# EAGLE board Keg Cop - Main (EAGLE 9.6.2)
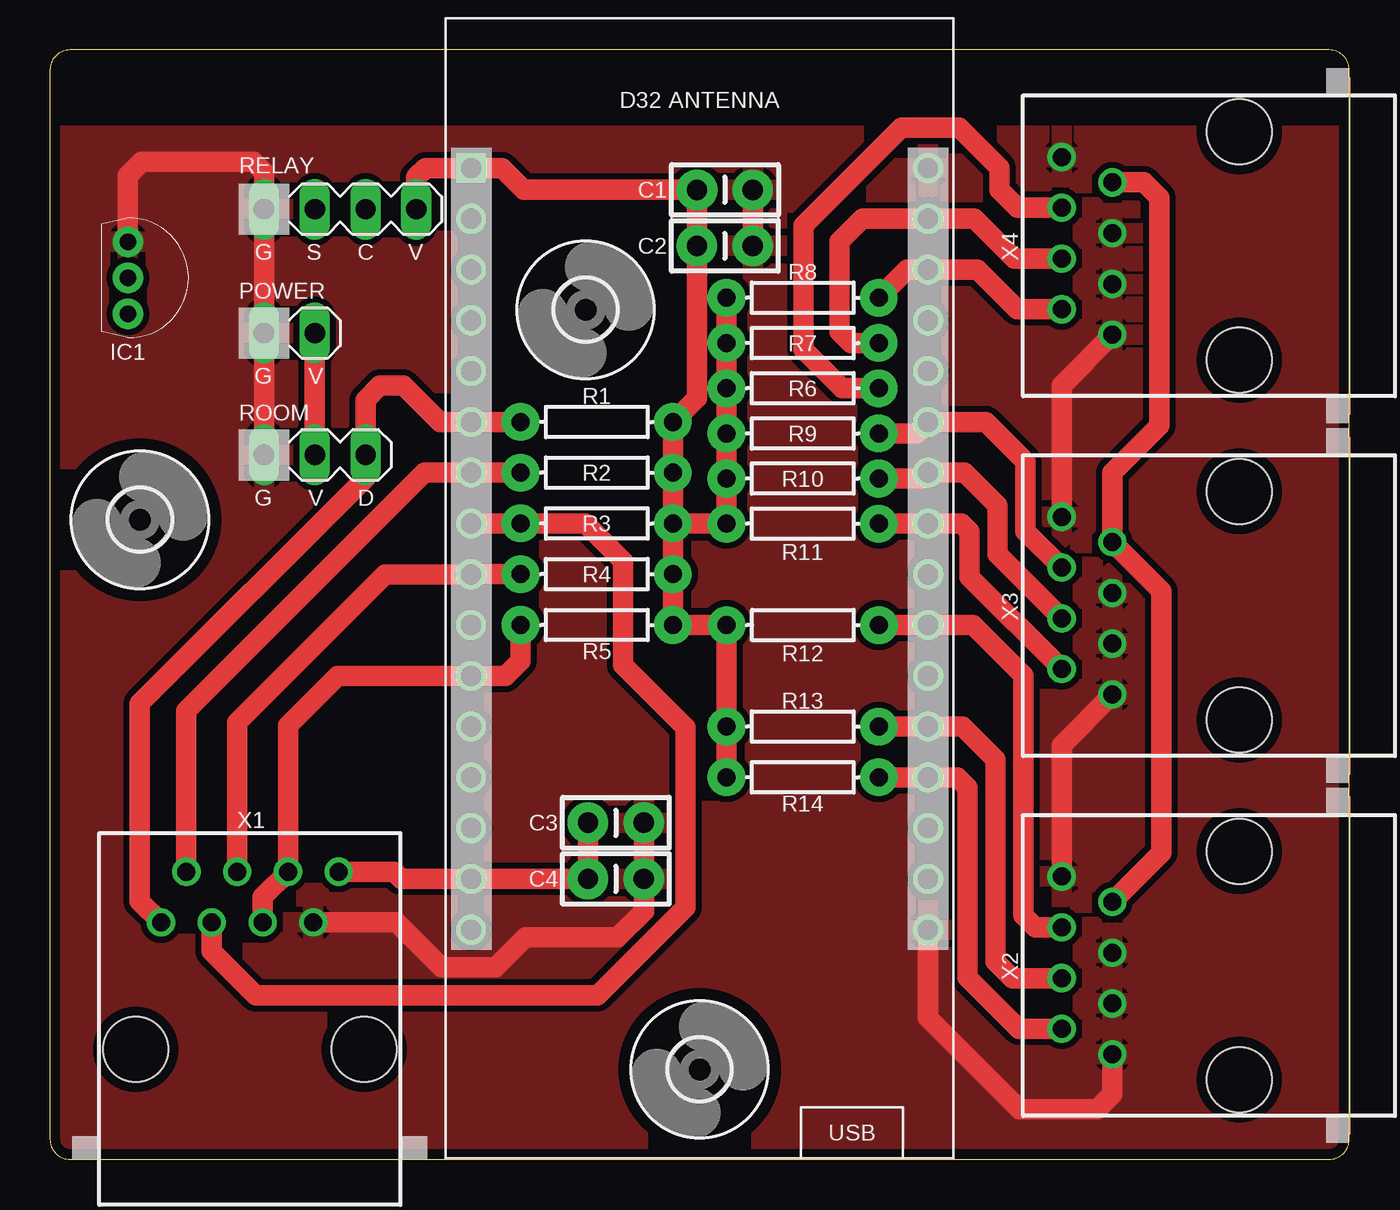
[diagram p0: board, top side]
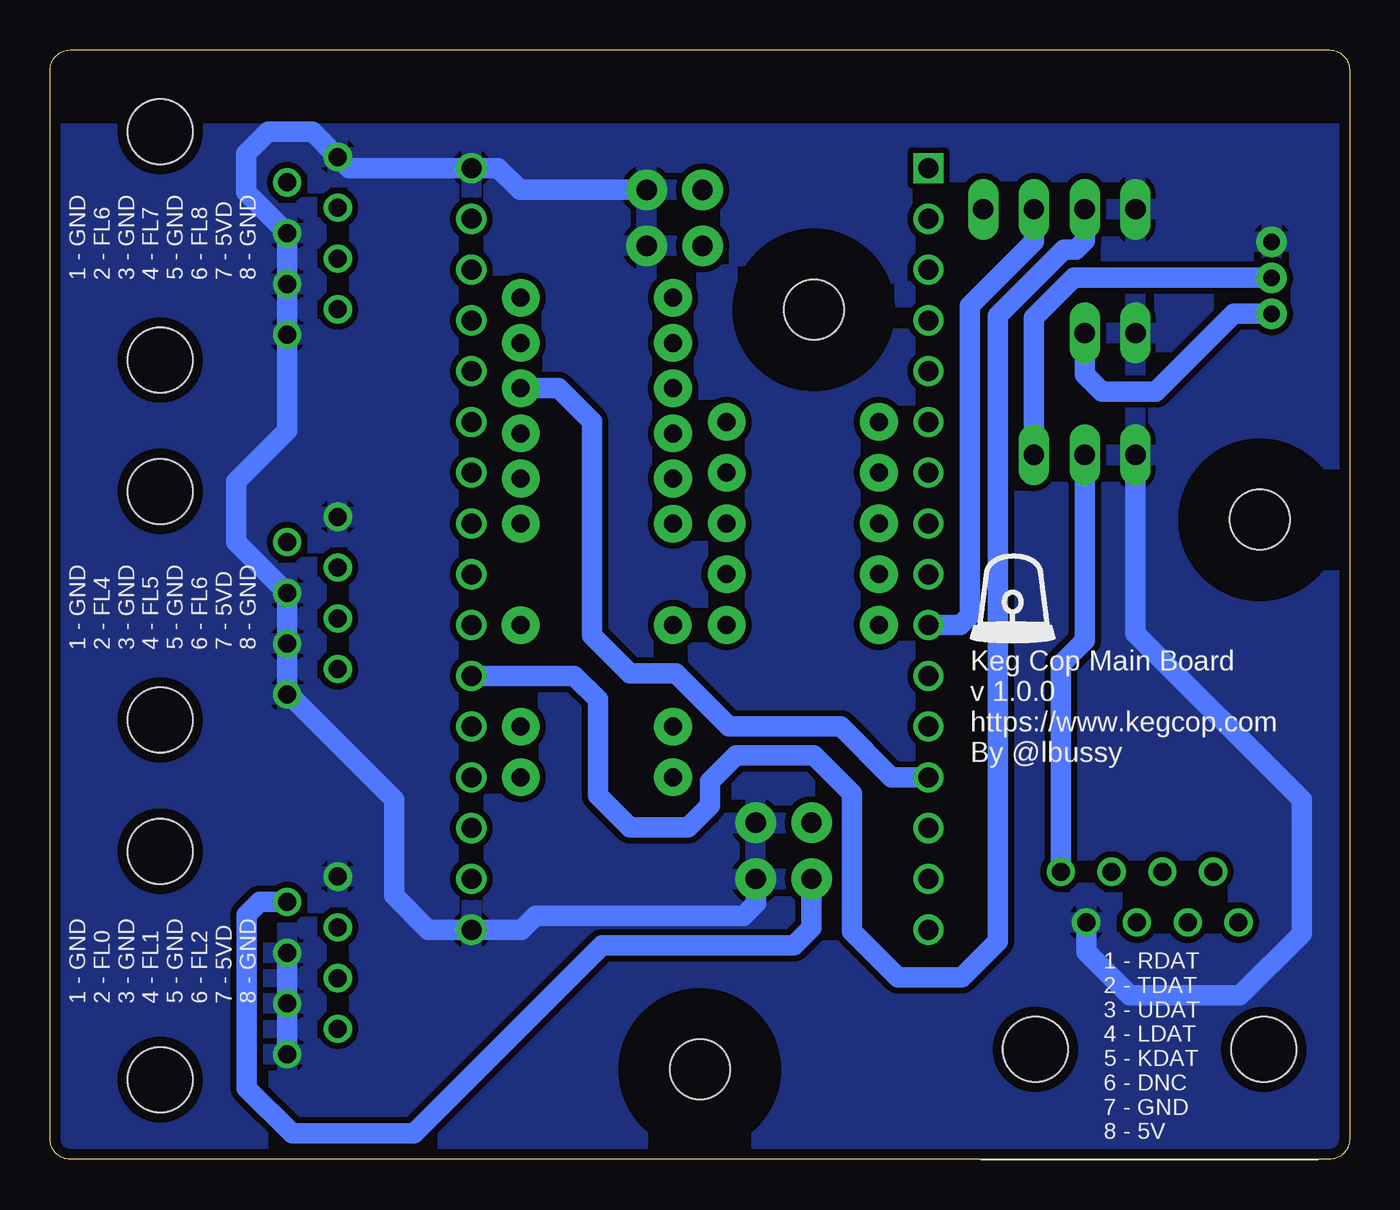
[diagram p1: board, bottom side, seen from below]

Size 65.01 x 55.51 mm. Coordinates in mm from the lower left corner, seen from the top.
Outline: 1,0.01 64,0.01 arc90 65,1.01 65,54.51 arc90 64,55.51 1,55.51 arc90 0,54.51 0,1.01 arc90 1,0.01
Copper layers (1*16): Top 0.035mm / dielectric 1.5mm / Bottom 0.035mm
Design rules "default *": minimum track width 6mil, minimum drill 0.35mm, track to track 6mil, track to pad 6mil, pad to pad 6mil, via to via 6mil, smd to smd 6mil, copper to edge 20mil, drill to drill 6mil, minimum pad ring 10mil, minimum via ring 8mil, stop-mask expansion 4mil, vias tented up to drill 20mil, thermal gap 10mil
Net classes: 0 default: width 0.305 mm, clearance 0.305 mm; 1 5v: width 0.406 mm, clearance 0.406 mm; 2 3v: width 0.406 mm, clearance 0.406 mm

## Footprints (pad centres in the part's own frame; a part is rotated, then mirrored left to right if it is on the bottom)
CAP_PTH-2.54 = drill 1.016 pad 2.032: 1 -1.397,0; 2 1.397,0
D32_NO_BATT = drill 1: EN -11.43,-12.7; GND 11.43,20.32; GND2 11.43,-17.78; IO0 11.43,-10.16; IO2 11.43,-12.7; IO4 11.43,-7.62; IO5 11.43,0; IO12 -11.43,-7.62; IO13 -11.43,-10.16; IO14 -11.43,-5.08; IO15 11.43,-15.24; IO16 11.43,-5.08; IO17 11.43,-2.54; IO18 11.43,2.54; IO19 11.43,5.08; IO21 11.43,7.62; IO22 11.43,15.24; IO23 11.43,17.78; IO25 -11.43,2.54; IO26 -11.43,0; IO27 -11.43,-2.54; IO32 -11.43,7.62; IO33 -11.43,5.08; IO34 -11.43,10.16; RST -11.43,17.78; RXD0 11.43,10.16; TXD0 11.43,12.7; VBAT -11.43,-17.78; VBUS -11.43,-15.24; VN -11.43,12.7; VP -11.43,15.24 | drill 1 square: VCC -11.43,20.32
TO-92 = drill 0.81 pad 1.51: 1 0,-1.8; 2 0,0; 3 0,1.8
HDR-2_VERT = drill 1.016 long: 1 0,0; 2 2.54,0
AXIAL-0.3 = drill 0.9 pad 1.88: P$1 -3.81,0; P$2 3.81,0
MA04-1 = drill 1.016 long: 1 -3.81,0; 2 -1.27,0; 3 1.27,0; 4 3.81,0
HDR-3_VERT = drill 1.016 long: 1 0,0; 2 2.54,0; 3 5.08,0
3,0 = hole 3: 0,0
RJ45-NO-SHIELD = drill 0.9 pad 1.4: 1 -4.445,6.35; 2 -3.175,8.89; 3 -1.905,6.35; 4 -0.635,8.89; 5 0.635,6.35; 6 1.905,8.89; 7 3.175,6.35; 8 4.445,8.89 | hole 3.251: -5.715,0; 5.715,0

## Placement (x,y rotation side)
C1  0.1μF  [CAP_PTH-2.54]  33.77,48.51 0 top
C2  1.0μF  [CAP_PTH-2.54]  33.76,45.71 0 top
C3  0.1μF  [CAP_PTH-2.54]  28.31,16.85 0 top
C4  1.0μF  [CAP_PTH-2.54]  28.31,14.04 0 top
D32  Lolin D32  [D32_NO_BATT]  32.5,29.28 0 top
IC1  DS18B20+  [TO-92]  3.9,44.11 180 top
POWER  2-PIN  [HDR-2_VERT]  10.71,41.35 0 top
R1  2.2kΩ  [AXIAL-0.3]  27.35,36.9 180 top
R2  2.2kΩ  [AXIAL-0.3]  27.35,34.36 180 top
R3  2.2kΩ  [AXIAL-0.3]  27.35,31.82 180 top
R4  2.2kΩ  [AXIAL-0.3]  27.35,29.28 180 top
R5  2.2kΩ  [AXIAL-0.3]  27.35,26.74 180 top
R6  2.2kΩ  [AXIAL-0.3]  37.66,38.59 180 top
R7  2.2kΩ  [AXIAL-0.3]  37.66,40.85 180 top
R8  2.2kΩ  [AXIAL-0.3]  37.66,43.11 180 top
R9  2.2kΩ  [AXIAL-0.3]  37.66,36.33 180 top
R10  2.2kΩ  [AXIAL-0.3]  37.66,34.07 180 top
R11  2.2kΩ  [AXIAL-0.3]  37.66,31.81 180 top
R12  2.2kΩ  [AXIAL-0.3]  37.66,26.74 180 top
R13  2.2kΩ  [AXIAL-0.3]  37.66,21.66 180 top
R14  2.2kΩ  [AXIAL-0.3]  37.66,19.13 180 top
RELAY  4-PIN  [MA04-1]  14.52,47.55 0 top
ROOM  3-PIN  [HDR-3_VERT]  10.71,35.25 0 top
U$1  [3,0]  4.5,32.01 0 top
U$2  [3,0]  32.5,4.51 0 top
U$3  [3,0]  26.8,42.51 0 top
X1  RJ45-8X  [RJ45-NO-SHIELD]  10,5.51 0 top
X2  RJ45-8X  [RJ45-NO-SHIELD]  59.5,9.71 90 top
X3  RJ45-8X  [RJ45-NO-SHIELD]  59.5,27.71 90 top
X4  RJ45-8X  [RJ45-NO-SHIELD]  59.5,45.71 90 top

## Library data of the parts
C1-C4 D32 POWER ROOM = Donnie
IC1 = SamacSys_Parts; ARROW_PART_NUMBER: DS18B20+; DESCRIPTION: DS18B20 prog thermometer 1-Wire, TO92; HEIGHT: mm; MANUFACTURER_NAME: Maxim Integrated; MANUFACTURER_PART_NUMBER: DS18B20+; MOUSER_PART_NUMBER: 700-DS18B20+; MOUSER_PRICE-STOCK: https://www.mouser.co.uk/ProductDetail/Maxim-Integrated/DS18B20%2b?qs=7H2Jq%252ByxpJKegCKabDbglA%3D%3D
R1-R14 = SparkFun-Resistors
RELAY = Donnie; OC_FARNELL: unknown; OC_NEWARK: unknown
U$1-U$3 = holes
X1-X4 = con-tycoelectronics; MPN: RJ45-8X; OC_FARNELL: unknown; OC_NEWARK: 16R6101

## Nets
3V3 [3v]: C1.1 C2.1 D32.VCC R1.P$1 R2.P$1 R3.P$1 R4.P$1 R5.P$1 R6.P$2 R7.P$2 R8.P$2 R9.P$2 R10.P$2 R11.P$2 R12.P$2 R13.P$2 R14.P$2 RELAY.4
5V [5v]: C3.1 C4.1 D32.VBUS IC1.3 POWER.2 ROOM.2 X1.8 X2.7 X3.7 X4.7
COOL: D32.IO27 RELAY.3
GND: C1.2 C2.2 C3.2 C4.2 D32.GND D32.GND2 IC1.1 POWER.1 RELAY.1 ROOM.1 X1.7 X2.1 X2.3 X2.5 X2.8 X3.1 X3.3 X3.5 X3.8 X4.1 X4.3 X4.5 X4.8
KDAT: D32.IO14 R5.P$2 X1.5 X1.6
KEG0: D32.IO0 R14.P$1 X2.2
KEG1: D32.IO4 R13.P$1 X2.4
KEG2: D32.IO17 R12.P$1 X2.6
KEG3: D32.IO18 R11.P$1 X3.2
KEG4: D32.IO19 R10.P$1 X3.4
KEG5: D32.IO21 R9.P$1 X3.6
KEG6: D32.IO22 R8.P$1 X4.2
KEG7: D32.IO23 R7.P$1 X4.4
KEG8: D32.IO13 R6.P$1 X4.6
LDAT: D32.IO26 R4.P$2 X1.4
RDAT: D32.IO32 IC1.2 R1.P$2 ROOM.3 X1.1
SOL: D32.IO16 RELAY.2
TDAT: D32.IO33 R2.P$2 X1.2
UDAT: D32.IO25 R3.P$2 X1.3

## Tracks (layer width: path | path; a pad name or v marks a point on that pad's centre or on a via)
3V3
  Top 1.016: R3.P$1 R4.P$1 R5.P$1 R12.P$2 | R3.P$1 R2.P$1 R1.P$1 32.36,38.1 C2.1 C1.1 23.7,48.51 22.61,49.6 D32.VCC 18.79,49.6 18.33,49.14 RELAY.4 | R8.P$2 R7.P$2 R6.P$2 R9.P$2 R10.P$2 R11.P$2 31.17,31.81 R3.P$1 | R12.P$2 | R14.P$2 R13.P$2 R12.P$2 | R12.P$2
5V
  Top 1.016: X1.8 17.21,14.4 17.57,14.04 D32.VBUS C4.1 C3.1 | ROOM.2 POWER.2 | X2.7 55.6,15.34 55.6,28.44 X3.7 53.15,34.36 55.5,36.71 55.5,48.11 54.73,48.89 X4.7
  Bottom 1.016: X1.8 14.45,24.77 13.25,25.96 ROOM.2 | POWER.2 13.25,39.26 12.4,38.41 9.7,38.41 5.8,42.31 IC1.3 | C4.1 26.91,11.6 27.8,10.71 37.4,10.71 46.8,1.31 52.9,1.31 55.16,3.57 55.16,12.25 54.52,12.89 X2.7
COOL
  Bottom 1.016: D32.IO27 19.47,26.74 19,27.21 19,42.61 19,42.71 15.79,45.92 RELAY.3
GND
  Top 1.016: C2.2 C1.2 | X1.7 17.35,11.86 19.6,9.61 22.3,9.61 23.8,11.11 28.4,11.11 29.71,12.42 C4.2 C3.2 | ROOM.1 POWER.1 RELAY.1 10.71,49.4 10.2,49.91 4.6,49.91 3.9,49.21 IC1.1 | X2.1 53.15,3.26 52.4,2.51 48.5,2.51 43.93,7.08 D32.GND2 | X3.8 50.61,38.73 X4.1 | X2.8 50.61,20.73 X3.1
  Bottom 1.016: C1.2 41.5,48.51 42.59,49.6 D32.GND 46.89,49.6 50.05,49.6 X4.8 51.87,51.41 54.1,51.41 55.2,50.31 55.2,48.4 X4.5 X4.3 X4.1 53.15,36.46 55.7,33.91 55.7,30.9 X3.5 X3.3 | X1.7 13.18,10.39 11,8.21 5.49,8.21 2.4,11.3 2.4,18.01 10.71,26.32 ROOM.1 | C4.2 29.7,12.81 30.31,12.2 40.71,12.2 41.41,11.5 D32.GND2 46.09,11.5 47.8,13.21 47.8,18.01 53.15,23.36 X3.3 | X2.1 X2.3 X2.5 | X3.1 X3.3
  pour Top: 65.4,51.21 65.4,-0.09 -0.2,-0.09 -0.2,51.21
  pour Bottom: -0.2,51.31 -0.2,-0.29 65.2,-0.29 65.2,51.31
KDAT
  Top 1.016: X1.5 10.63,13.13 X1.6 11.9,21.72 14.39,24.2 D32.IO14 22.79,24.2 23.54,24.95 R5.P$2
KEG0
  Top 1.016: X2.2 48.48,6.54 45.9,9.11 45.9,18.61 45.39,19.12 D32.IO0 R14.P$1
KEG1
  Top 1.016: X2.4 48.13,9.08 47.3,9.91 47.3,20.01 45.65,21.66 D32.IO4 R13.P$1
KEG2
  Top 1.016: X2.6 49.3,11.62 48.7,12.21 48.7,24.21 46.17,26.74 D32.IO17 R12.P$1
KEG3
  Top 1.016: X3.2 46,29.15 46,31.41 45.59,31.82 D32.IO18 R11.P$1
KEG4
  Top 1.016: X3.4 47.4,30.29 47.4,32.71 45.75,34.36 D32.IO19 43.64,34.07 R10.P$1
KEG5
  Top 1.016: X3.6 48.8,31.43 48.8,34.91 46.81,36.9 D32.IO21 43.36,36.33 R9.P$1
KEG6
  Top 1.016: X4.2 48.38,42.54 46.39,44.52 D32.IO22 42.88,44.52 R8.P$1
KEG7
  Top 1.016: X4.4 48.23,45.08 46.25,47.06 D32.IO23 40.65,47.06 39.5,45.91 39.5,41.41 40.06,40.85 R7.P$1
KEG8
  Top 1.016: R6.P$1 39.62,38.59 37.7,40.51 37.7,46.71 42.6,51.61 45.5,51.61 47.5,49.61 47.5,48.51 48.4,47.61 X4.6
  Bottom 1.016: R6.P$1 39.58,38.59 37.9,36.91 37.9,26.21 36,24.31 33.7,24.31 31.05,21.66 30.25,21.66 25.45,21.66 22.91,19.12 D32.IO13
LDAT
  Top 1.016: X1.4 9.37,21.88 16.77,29.28 20.9,29.28 | 20.9,29.28 D32.IO26 | R4.P$2 20.9,29.28
RDAT
  Top 1.016: X1.1 4.5,12.92 4.5,22.81 15.79,34.1 ROOM.3 15.79,38 16.5,38.71 17.7,38.71 19.51,36.9 D32.IO32 R1.P$2
  Bottom 1.016: ROOM.3 15.79,42.1 15.8,42.11 13.8,44.11 IC1.2
SOL
  Bottom 1.016: RELAY.2 13.25,45.96 13.7,45.51 14.3,45.51 17.6,42.21 17.6,10.91 19.4,9.11 22.6,9.11 24.9,11.41 24.9,18.31 26.8,20.21 30.7,20.21 32,18.91 32,17.71 33.1,16.61 36,16.61 37.6,18.21 37.6,23.01 38.79,24.2 D32.IO16
TDAT
  Top 1.016: X1.2 6.83,22.44 18.75,34.36 D32.IO33 21.18,34.36 R2.P$2
UDAT
  Top 1.016: X1.3 8.1,10.42 10.3,8.21 27.4,8.21 31.8,12.61 31.8,21.61 28.66,24.75 28.66,29.95 26.79,31.82 R3.P$2 21.18,31.82 D32.IO25

## Text on the board
tNames: G | S | C | V | G | V | G | V | D
bNames: 1 - GND / 2 - FL6 / 3 - GND / 4 - FL7 / 5 - GND / 6 - FL8 / 7 - 5VD / 8 - GND | 1 - GND / 2 - FL4 / 3 - GND / 4 - FL5 / 5 - GND / 6 - FL6 / 7 - 5VD / 8 - GND | Keg Cop Main Board / v 1.0.0 / https://www.kegcop.com / By @lbussy | 1 - GND / 2 - FL0 / 3 - GND / 4 - FL1 / 5 - GND / 6 - FL2 / 7 - 5VD / 8 - GND | 1 - RDAT / 2 - TDAT / 3 - UDAT / 4 - LDAT / 5 - KDAT / 6 - DNC / 7 - GND / 8 - 5V